# Altium PCB PCB1.PcbDoc
Units mil, origin at the board's own origin, x right, y up, seen from the top; angles counter-clockwise.
Board outline 1968.5 x 1377.95 mil, 4 copper layers (Top Layer, L2, L3, Bottom Layer), stack 30.634 mil thick; 121 components, 133 nets, 489 pads, 153 vias.
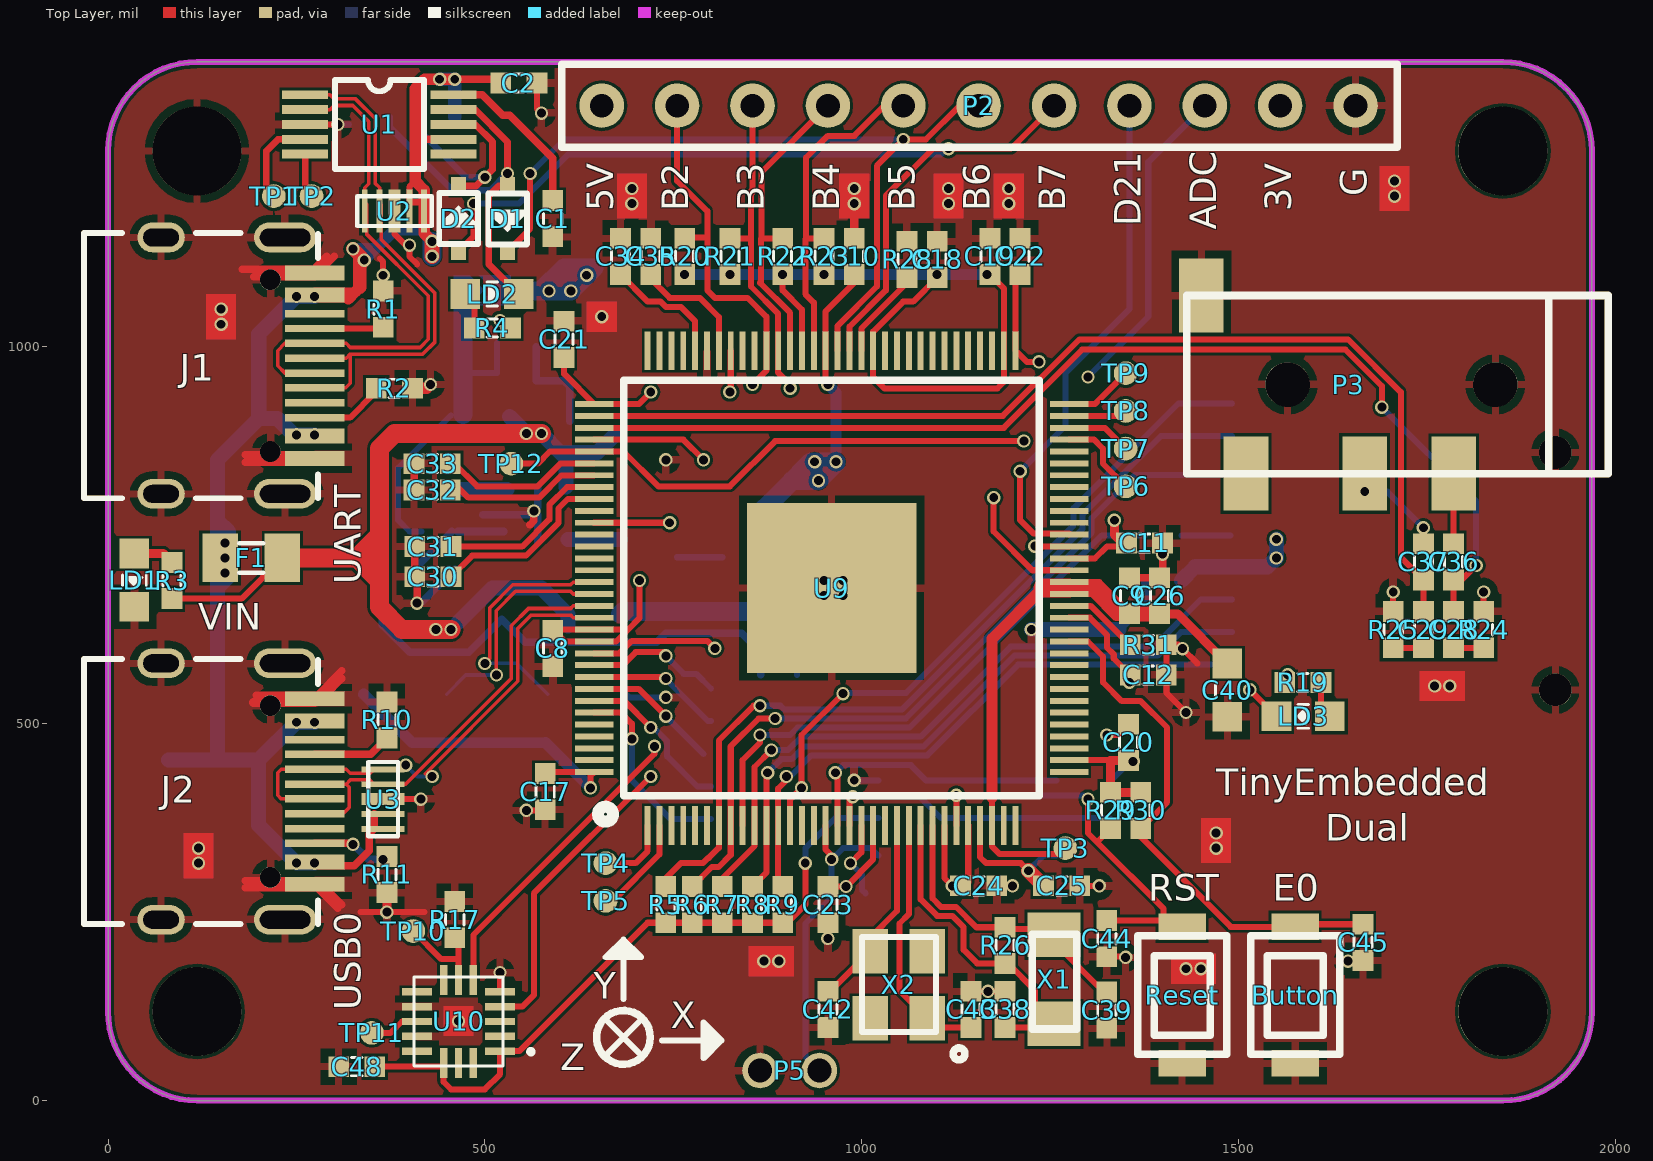
[diagram p0: Top Layer view]
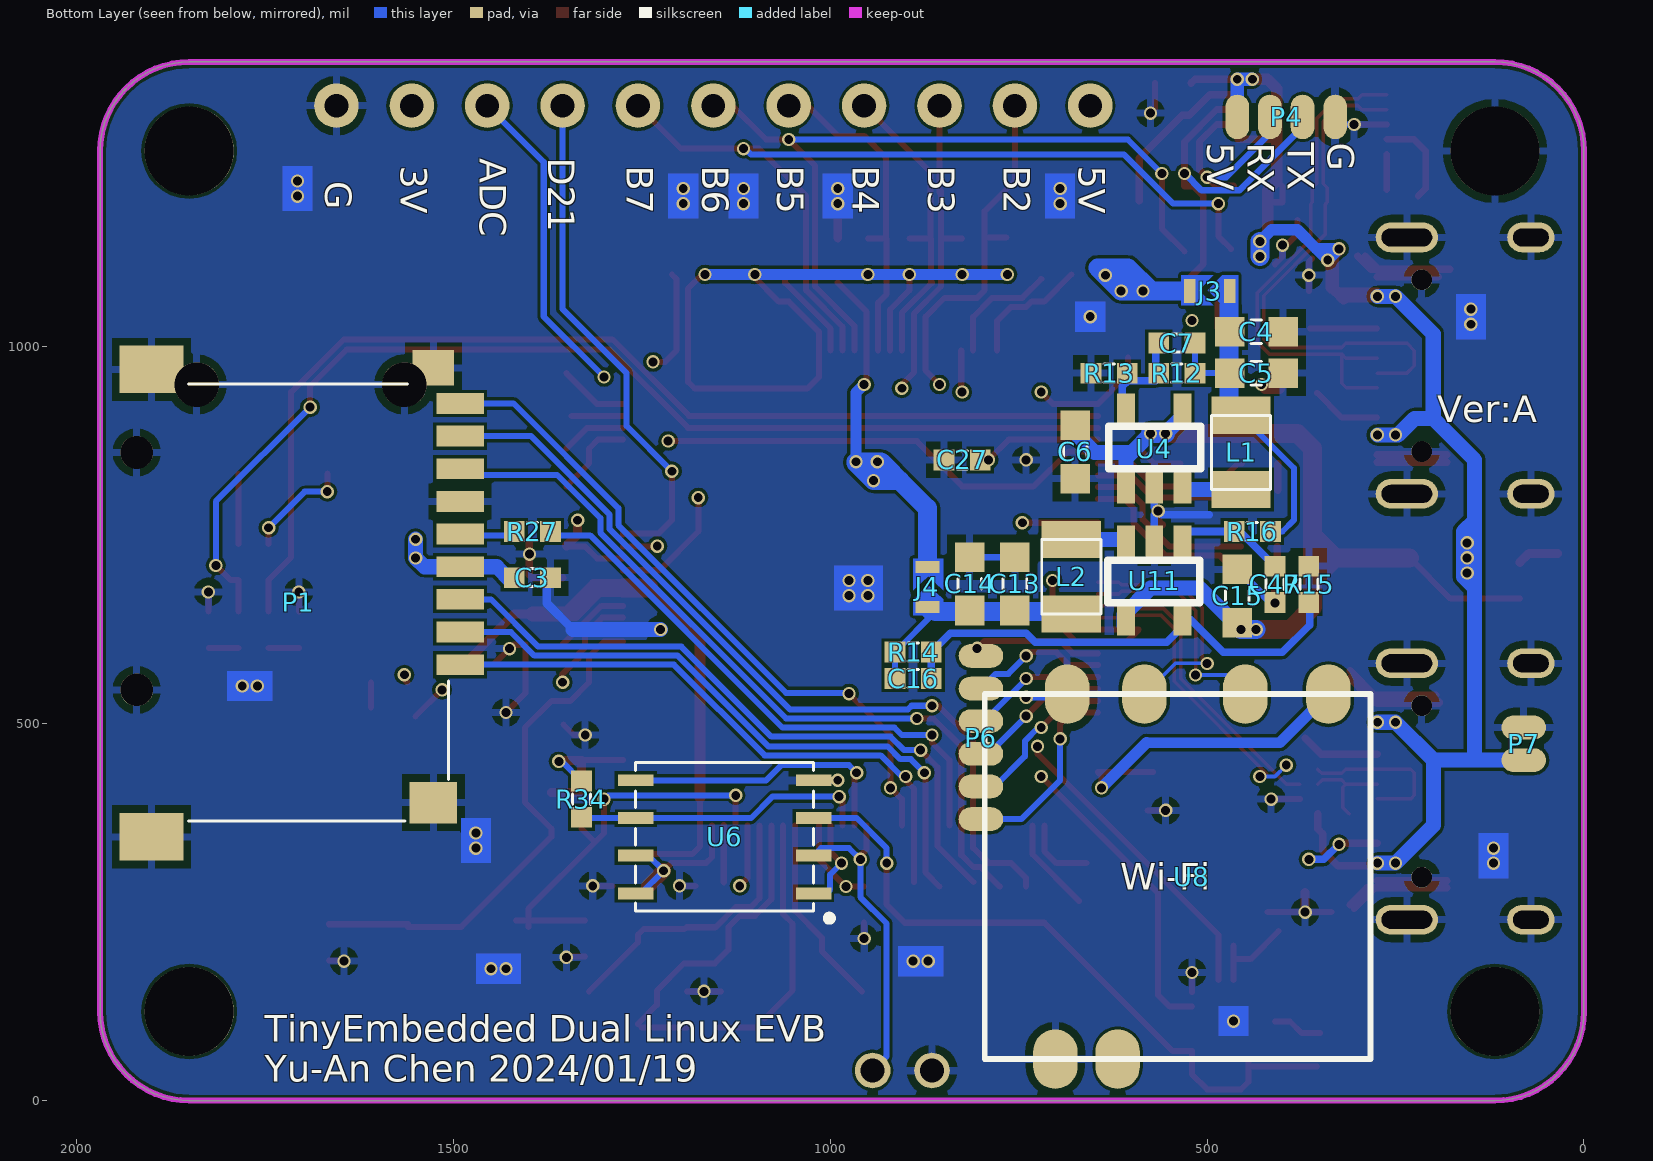
[diagram p1: Bottom Layer view, seen from below]
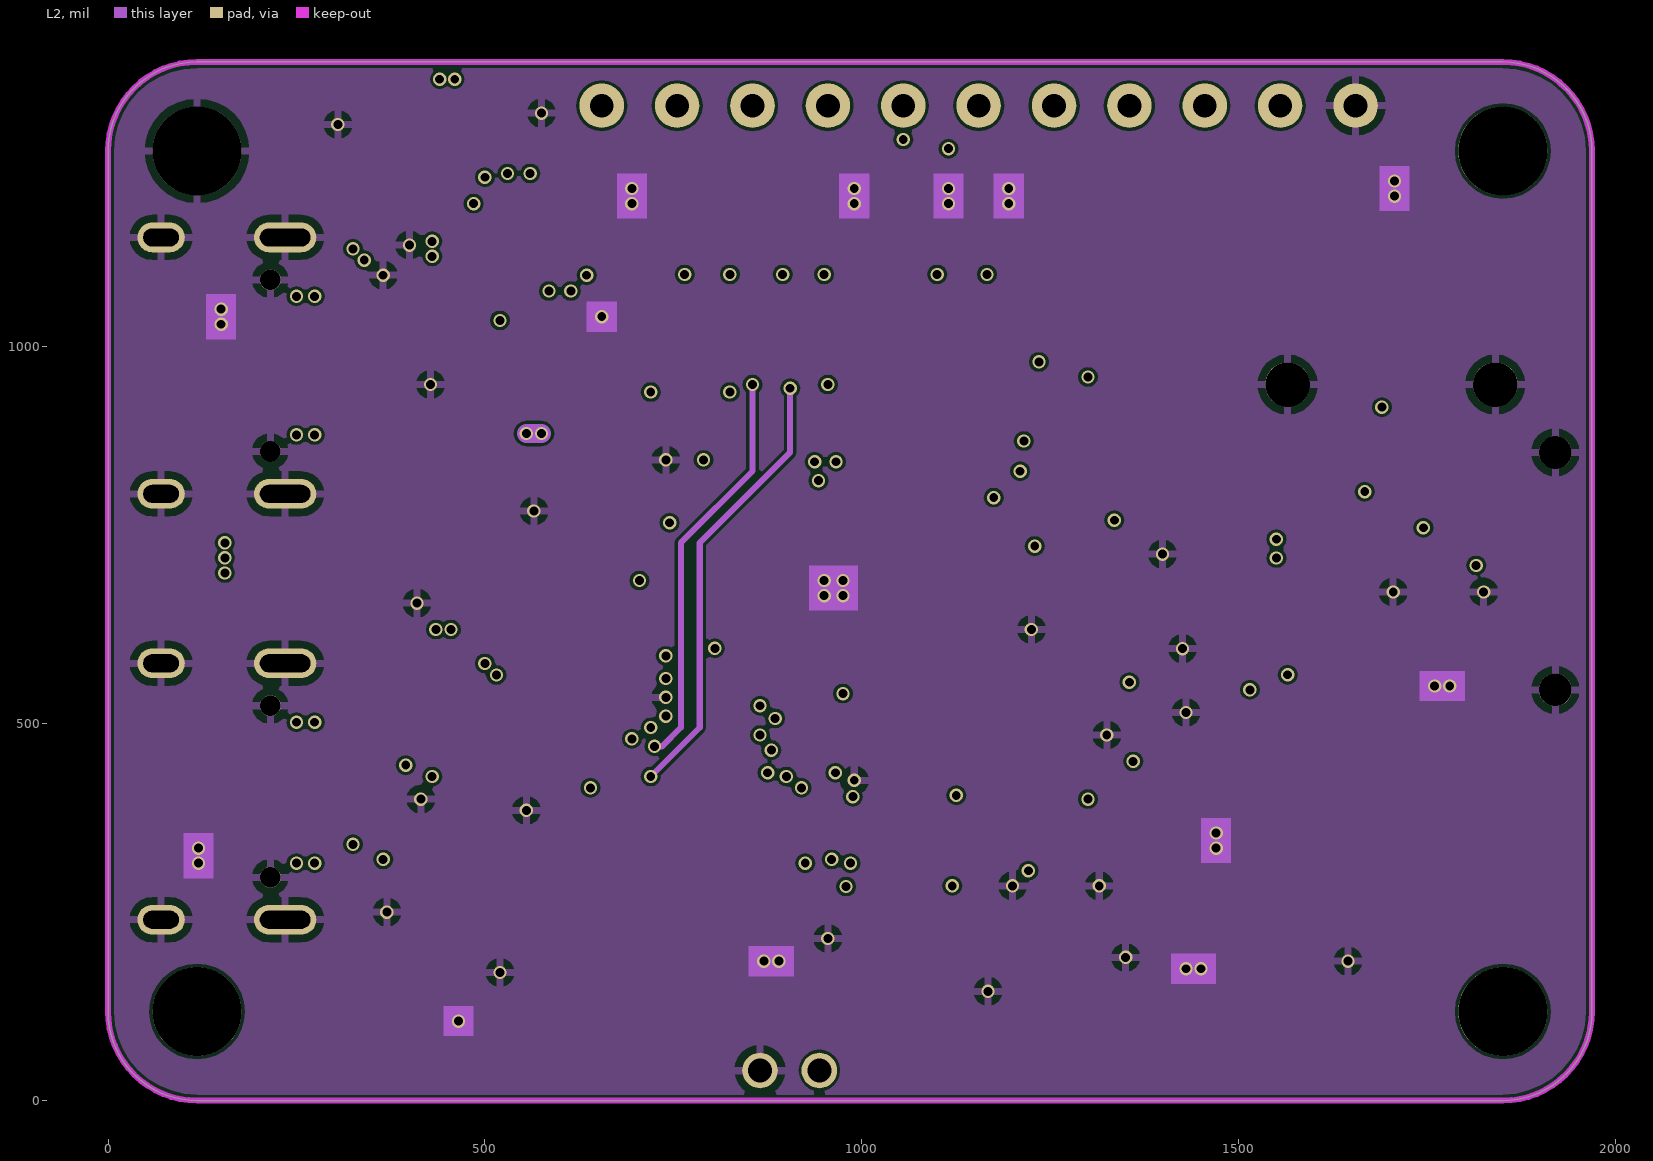
[diagram p2: L2]
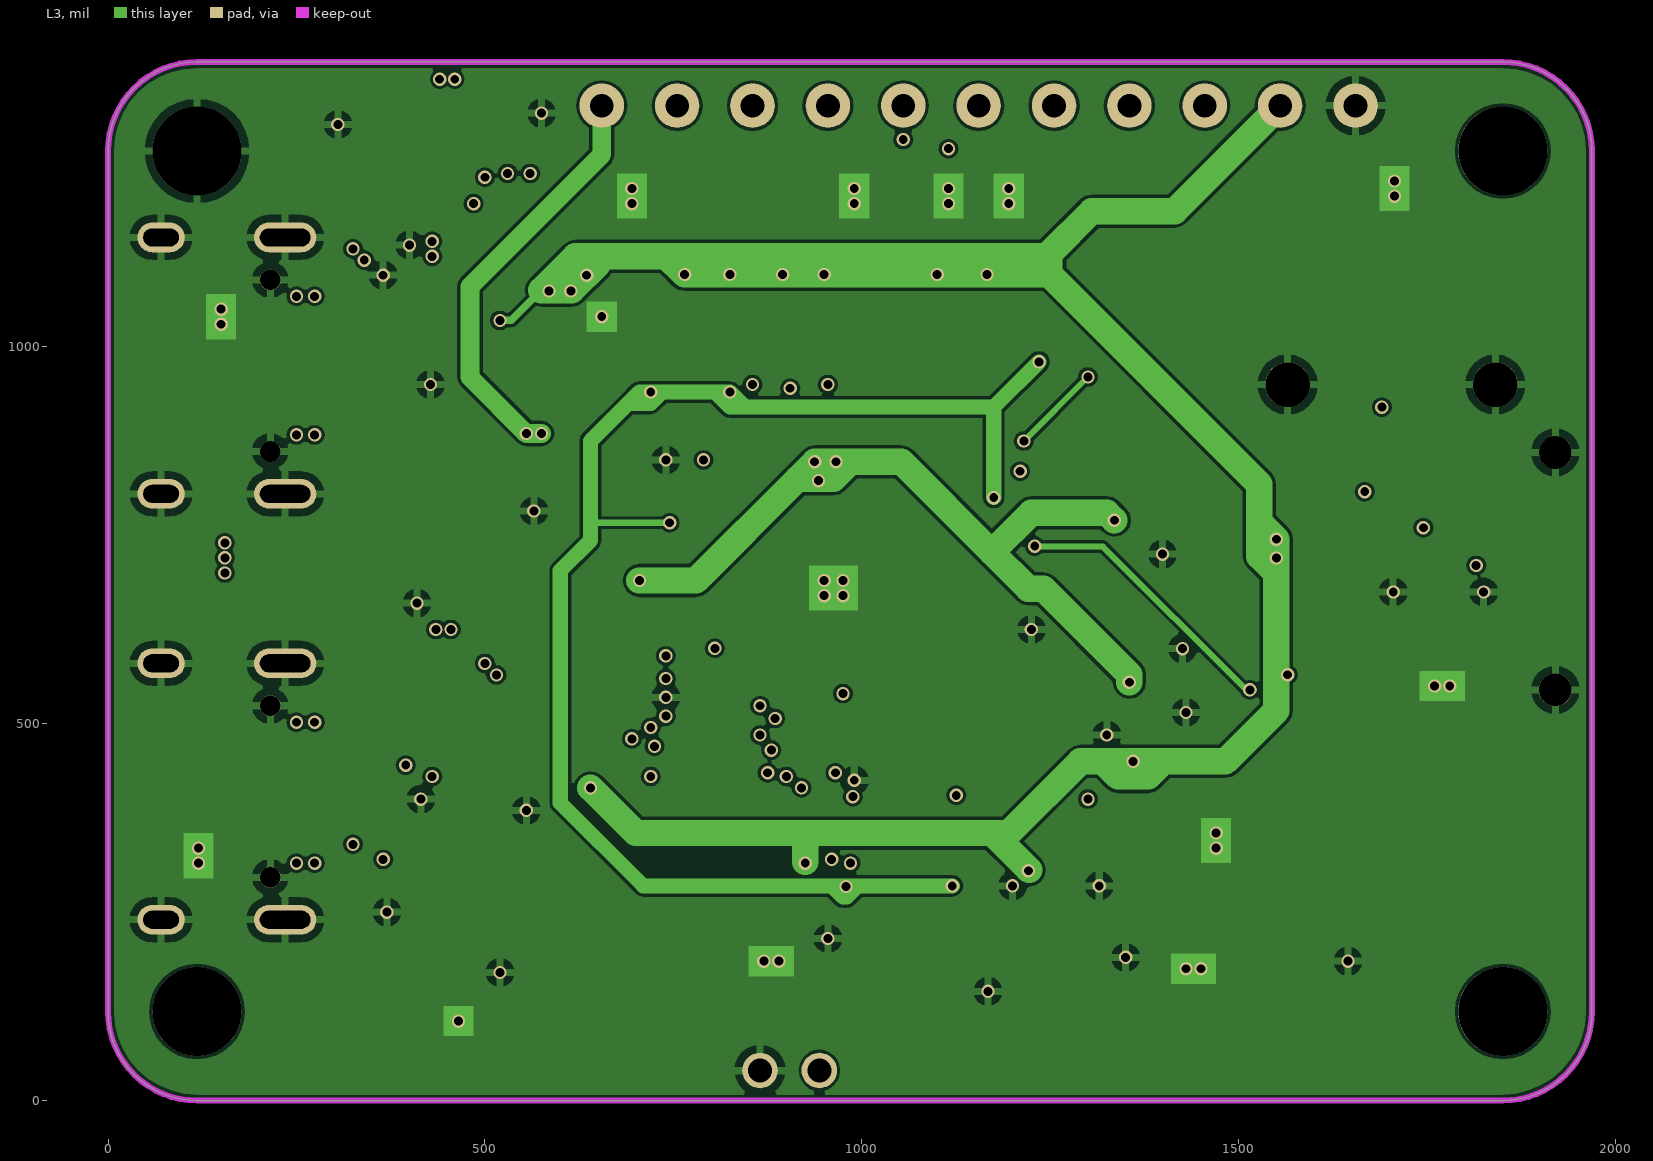
[diagram p3: L3]

## Layer stack, top to bottom
Top Solder: solder mask 0.4, Solder Resist, Dk 3.5
Top Layer: signal copper 1.4
Dielectric 1: core 10, FR-4, Dk 4.2
L2: signal copper 1.417
Dielectric 3: prepreg 5, Dk 4.2
L3: signal copper 1.417
Dielectric 2: core 10, Dk 4.2
Bottom Layer: signal copper 1.4
Bottom Solder: solder mask 0.4, Solder Resist, Dk 3.5

## Board outline
0,118.11 ccw(c118.11,118.11) 118.11,0 1850.39,0 ccw(c1850.39,118.11) 1968.5,118.11 1968.5,1259.84 ccw(c1850.39,1259.84) 1850.39,1377.95 118.11,1377.95 ccw(c118.11,1259.84) 0,1259.84

## Design rules (kind name [scope] priority, off if disabled: settings)
Clearance [All] p1: gap=4
ComponentClearance [All] p1 off: gap=10 collisioncheckmode=3 verticalgap=10 showdistances=FALSE
DiffPairsRouting [All] p1: maxlimit=4 minlimit=4 mostfreqgap=4 toplayer_minwidth=4.5 toplayer_maxwidth=4.7 toplayer_prefwidth=4.7 midlayer1_minwidth=4.5 midlayer1_maxwidth=4.7 midlayer1_prefwidth=4.7 midlayer2_minwidth=4.5 midlayer2_maxwidth=4.7 midlayer2_prefwidth=4.7 bottomlayer_minwidth=4.5 bottomlayer_maxwidth=4.7 bottomlayer_prefwidth=4.7 maxuncoupledlength=500
PolygonConnect [All] p1: connectstyle=Relief reliefconductorwidth=10 reliefentries=4 polygonreliefangle="90 Angle" airgapwidth=10
RoutingVias [All] p1: holewidth=11.81 width=17.72 viastyle="Through Hole" minholewidth=11.81 minwidth=17.72 maxholewidth=11.81 maxwidth=17.72
SolderMaskExpansion [All] p1: expansion=4
Width [All] p1: maxlimit=35 minlimit=8 preferedwidth=8
28 further rules are at their usual default settings.

## Classes and differential pairs
net class SDIO0: SDC0_CLK SDC0_CMD SDC0_D0 SDC0_D1 SDC0_D2 SDC0_D3
component class Sheet1: C1 C2 C3 C36 C37 D1 D2 F1 J1 J2 LD1 LD2 P1 P3 P4 P7 R1 R2 R3 R4 R5 R6 R7 R8 R9 R10 R11 TP1 TP2 U1 U2 U3
component class Sheet2: Button C44 C45 C48 LD3 P2 P5 R17 R19 R20 R21 R22 R23 R29 R30 R34 Reset TP10 TP11 U6 U8 U10
component class Sheet3: C25 C27 C28 C29 C30 C31 C32 C33 C34 C35 C38 C39 C42 C43 P6 R24 R25 R26 R27 R28 R31 TP3 TP4 TP5 TP6 TP7 TP8 TP9 TP12 U9 X1 X2
component class Sheet4: C4 C5 C6 C7 C8 C9 C10 C11 C12 C13 C14 C15 C16 C17 C18 C19 C20 C21 C22 C23 C24 C26 C40 C47 J3 J4 L1 L2 R12 R13 R14 R15 R16 U4 U11
differential pair USB1: +USB1_P -USB1_N
differential pair USB0: +USB0_P -USB0_N
differential pair USB_UART: +USB_UART_P -USB_UART_N

## Components (designator, comment, footprint, x,y, rotation, side; value= is the part's Value field where it differs from the comment)
Button "SW_2P" SW_2P_4 1575,140 r270 top
C1 "0.1uF,0402" C0402 590,1170 r270 top
C2 "0.1uF,0402" C0402 545,1350 r180 top
C3 "0.1uF,0402" C0402 1395,693.78 r0 bottom
C4 "22uF,0603" C0603 435,1020 r0 bottom
C5 "22uF,0603" C0603 435,965 r0 bottom
C6 "10uF,0603" C0603 675,860 r270 bottom
C7 "10pF,0402" C0402 540,1005 r0 bottom
C8 "0.1uF,0402" C0402 590,600 r90 top
C9 "0.1uF,0402" C0402 1355,669.78 r270 top
C10 "0.1uF,0402" C0402 990,1120 r270 top
C11 "0.1uF,0402" C0402 1375,739.78 r180 top
C12 "0.1uF,0402" C0402 1380,564.78 r180 top
C13 "22uF,0603" C0603 755,685 r270 bottom
C14 "22uF,0603" C0603 815,685 r270 bottom
C15 "10uF,0603" C0603 460,670 r90 bottom
C16 "10pF,0402" C0402 890,560 r180 bottom
C17 "0.1uF,0402" C0402 580,410 r90 top
C18 "0.1uF,0402" C0402 1100,1116 r270 top
C19 "0.1uF,0402" C0402 1170,1120 r270 top
C20 "0.1uF,0402" C0402 1353.78,475.22 r270 top
C21 "0.1uF,0402" C0402 605,1010 r270 top
C22 "0.1uF,0402" C0402 1210,1120 r270 top
C23 "0.1uF,0402" C0402 955,260 r90 top
C24 "4.7uF,0402" C0402 1155,285 r180 top
C25 "4.7uF,0402" C0402 1265,285 r180 top
C26 "0.1uF,0402" C0402 1395,669.78 r270 top
C27 "0.1uF,0402" C0402 825,850 r180 bottom
C28 "0.1uF,0402" C0402 1785,624.78 r90 top
C29 "0.1uF,0402" C0402 1745,624.78 r90 top
C30 "*0.1uF,0402" C0402 431,695 r0 top
C31 "*0.1uF,0402" C0402 431,735 r0 top
C32 "*0.1uF,0402" C0402 430,810 r0 top
C33 "*0.1uF,0402" C0402 430,845 r0 top
C34 "0.1uF,0402" C0402 680,1120 r270 top
C35 "0.1uF,0402" C0402 720,1120 r270 top
C36 "4.7uF,0402" C0402 1785,714.78 r90 top
C37 "4.7uF,0402" C0402 1745,714.78 r90 top
C38 "12pF,0402" C0402 1190,121 r90 top
C39 "12pF,0402" C0402 1325,120 r270 top
C40 "10uF,0603" C0603 1485,545 r90 top
C42 "20pF,0402" C0402 955,121 r270 top
C43 "20pF,0402" C0402 1145,121 r90 top
C44 "0.1uF,0402" C0402 1325,215 r270 top
C45 "0.1uF,0402" C0402 1665,210 r270 top
C47 "0.1uF,0402" C0402 410,685 r90 bottom
C48 "0.1uF,0402" C0402 330,45 r180 top
D1 "1N5819" SOD-323 530,1170 r270 top
D2 "1N5819" SOD-323 465,1170 r90 top
F1 "5V,1.5A,0805" F0805 190,720 r0 top
J1 "TypeC_F" Type-C_16P_F_0.5_DIP 235,805 r0 top locked
J2 "TypeC_F" Type-C_16P_F_0.5_DIP 235,240 r0 top locked
J3 "Jump_2" Jp0603 460,1075 r0 bottom
J4 "Jump_2" Jp0603 870,645 r90 bottom
L1 "2.2uH" IND_252010_SMD 455,860 r90 bottom
L2 "2.2uH" IND_252010_SMD 680,695 r270 bottom
LD1 "green,0603" LED0603 35,690 r270 top
LD2 "blue,0603" LED0603 510,1070 r0 top
LD3 "white,0603" LED0603 1585,509.78 r180 top
P1 "MicroSD" MicroSD 1920,665 r270 bottom locked
P2 "Header_11" Header_11 1255,1320 r180 top
P3 "PJ-320D" PJ-320D 1990,950 r180 top
P4 "Header_4" HEADER_4_SMD 330,1305 r0 bottom
P5 "Header_2_2mm" Header_2_2mm 865,40 r90 top
P6 "Header_6_SMD" HEADER_6_SMD 800,590 r270 bottom
P7 "Header_2_SMD" HEADER_2_SMD 80,495 r270 bottom
R1 "5.1KΩ,0402" R0402 365,1050 r270 top
R2 "5.1KΩ,0402" R0402 380,945 r180 top
R3 "4.7KΩ,0402" R0402 85,690 r90 top
R4 "4.7KΩ,0402" R0402 510,1025 r180 top
R5 "4.7KΩ,0402" R0402 740,260 r270 top
R6 "4.7KΩ,0402" R0402 775,260 r270 top
R7 "4.7KΩ,0402" R0402 815,260 r270 top
R8 "4.7KΩ,0402" R0402 855,260 r270 top
R9 "4.7KΩ,0402" R0402 895,260 r270 top
R10 "5.1KΩ,0402" R0402 370,505 r270 top
R11 "5.1KΩ,0402" R0402 370,300 r90 top
R12 "680KΩ,0402" R0402 540,965 r0 bottom
R13 "150KΩ,0402" R0402 630,965 r180 bottom
R14 "75KΩ,0402" R0402 890,595 r180 bottom
R15 "150KΩ,0402" R0402 365,685 r270 bottom
R16 "100KΩ,0402" R0402 440,755 r180 bottom
R17 "*0Ω,0402" R0402 460,240 r90 top
R19 "4.7KΩ,0402" R0402 1585,554.78 r180 top
R20 "4.7KΩ,0402" R0402 765,1120 r270 top
R21 "4.7KΩ,0402" R0402 825,1120 r270 top
R22 "*4.7KΩ,0402" R0402 895,1120 r270 top
R23 "*4.7KΩ,0402" R0402 950,1120 r270 top
R24 "33Ω,0402" R0402 1825,624.78 r270 top
R25 "33Ω,0402" R0402 1705,624.78 r270 top
R26 "680kΩ,0402" R0402 1190,206 r270 top
R27 "33Ω,0402" R0402 1395,755 r0 bottom
R28 "75Ω,0402" R0402 1060,1116 r270 top
R29 "4.7Ω,0402" R0402 1330,385 r270 top
R30 "4.7Ω,0402" R0402 1370,385 r270 top
R31 "240Ω,0402,1%" R0402 1380,604.78 r0 top
R34 "10KΩ,0402" R0402 1330,400 r90 bottom
Reset "SW_2P" SW_2P_4 1425,140 r270 top
TP1 "TP" TP 220,1200 r90 top
TP2 "TP" TP 270,1200 r90 top
TP3 "TP" TP 1270,335 r90 top
TP4 "TP" TP 660,315 r90 top
TP5 "TP" TP 660,265 r90 top
TP6 "TP" TP 1350,815 r90 top
TP7 "TP" TP 1350,865 r90 top
TP8 "TP" TP 1350,915 r90 top
TP9 "TP" TP 1350,965 r90 top
TP10 "TP" TP 405,225 r90 top
TP11 "TP" TP 350,90 r90 top
TP12 "TP" TP 535,845 r90 top
U1 "CH340E" MSOP-10 360,1295 r0 top
U2 "TPD4E05U06" USON-10 380,1180 r90 top
U3 "TPD4E05U06" USON-10 365,400 r0 top
U4 "SY8088" SOT-23-5p 570,865 r90 bottom
U6 "SPI Flash" WSON8 1140,350 r0 bottom
U8 "USB Wi-Fi Module" BL-M8188FU3 795,55 r90 bottom locked
U9 "Allwinner T113-s3" eLQFP128 960,680 r0 top locked
U10 "LIS3DH" LGA-16 465,105 r180 top
U11 "SY8088" SOT-23-5p 570,690 r270 bottom
X1 "32.768kHz" XTAL_3215_32.768KHz 1255,161 r270 top
X2 "24MHz" XTAL_SMD_3225 1000,91 r90 top

## Footprints (in the part's own frame and the unit in brackets; to place one, negate y for a bottom-side part, rotate by r counter-clockwise, add the part's x,y. Pads: shape width x height; smd on the part's side, far side on the other; paste and mask are expansions set on the pad)
BL-M8188FU3 [mm]
  oval 2x1.5 smd: 01(0,-2.38) 02(0,-4.48) 03(12.3,-11.58) 04(12.3,-8.78) 05(12.3,-5.38) 06(12.3,-2.78)
  silkscreen extent 0,-13 12.3,0
C0402 [mm]
  rect 0.7x0.7 smd: 01(-0.61,0) 02(0.61,0)
  silkscreen extent -0.18,-0.3 0.18,0.3, body extent -0.5,-0.25 0.5,0.25, height 0.58
C0603 [mm]
  rect 1x1 smd: 01(-0.911,0) 02(0.886,0)
  silkscreen extent -0.19,-0.4 0.17,0.4, body extent -0.81,-0.41 0.81,0.41, height 0.58
eLQFP128 [mm]
  rect 0.2x1.3 smd: 01(-6.2,-8) 02(-5.8,-8) 03(-5.4,-8) 04(-5,-8) 05(-4.6,-8) 06(-4.2,-8) 07(-3.8,-8) 08(-3.4,-8) 09(-3,-8) 10(-2.6,-8) 11(-2.2,-8) 12(-1.8,-8) 13(-1.4,-8) 14(-1,-8) 15(-0.6,-8) 16(-0.2,-8) 17(0.2,-8) 18(0.6,-8) 19(1,-8) 20(1.4,-8) 21(1.8,-8) 22(2.2,-8) 23(2.6,-8) 24(3,-8) 25(3.4,-8) 26(3.8,-8) 27(4.2,-8) 28(4.6,-8) 29(5,-8) 30(5.4,-8) 31(5.8,-8) 32(6.2,-8) 65(6.2,8) 66(5.8,8) 67(5.4,8) 68(5,8) 69(4.6,8) 70(4.2,8) 71(3.8,8) 72(3.4,8) 73(3,8) 74(2.6,8) 75(2.2,8) 76(1.8,8) 77(1.4,8) 78(1,8) 79(0.6,8) 80(0.2,8) 81(-0.2,8) 82(-0.6,8) 83(-1,8) 84(-1.4,8) 85(-1.8,8) 86(-2.2,8) 87(-2.6,8) 88(-3,8) 89(-3.4,8) 90(-3.8,8) 91(-4.2,8) 92(-4.6,8) 93(-5,8) 94(-5.4,8) 95(-5.8,8) 96(-6.2,8)
  rect 1.3x0.2 smd: 33(8,-6.2) 34(8,-5.8) 35(8,-5.4) 36(8,-5) 37(8,-4.6) 38(8,-4.2) 39(8,-3.8) 40(8,-3.4) 41(8,-3) 42(8,-2.6) 43(8,-2.2) 44(8,-1.8) 45(8,-1.4) 46(8,-1) 47(8,-0.6) 48(8,-0.2) 49(8,0.2) 50(8,0.6) 51(8,1) 52(8,1.4) 53(8,1.8) 54(8,2.2) 55(8,2.6) 56(8,3) 57(8,3.4) 58(8,3.8) 59(8,4.2) 60(8,4.6) 61(8,5) 62(8,5.4) 63(8,5.8) 64(8,6.2) 97(-8,6.2) 98(-8,5.8) 99(-8,5.4) 100(-8,5) 101(-8,4.6) 102(-8,4.2) 103(-8,3.8) 104(-8,3.4) 105(-8,3) 106(-8,2.6) 107(-8,2.2) 108(-8,1.8) 109(-8,1.4) 110(-8,1) 111(-8,0.6) 112(-8,0.2) 113(-8,-0.2) 114(-8,-0.6) 115(-8,-1) 116(-8,-1.4) 117(-8,-1.8) 118(-8,-2.2) 119(-8,-2.6) 120(-8,-3) 121(-8,-3.4) 122(-8,-3.8) 123(-8,-4.2) 124(-8,-4.6) 125(-8,-5) 126(-8,-5.4) 127(-8,-5.8) 128(-8,-6.2)
  rect 5.72x5.72 smd: 129(0,0)
  silkscreen extent -7.87,-7.87 7,7, body extent -8,-8 8,8, height 1.4
F0805 [mm]
  rect 1.2x1.63 smd: 01(-1.05,0) 02(1.05,0)
  silkscreen extent -0.4,-0.5 0.4,0.5, body extent -1.05,-0.5 1.05,0.5, height 0.5
Header_2_2mm [mm]
  round 1.2 hole 0.8: 01(0,0) 02(0,-2)
HEADER_2_SMD [mm]
  oval 0.8x1.5 smd: 01(0,0) 02(1.1,0)
HEADER_4_SMD [mm]
  oval 0.8x1.5 smd: 01(0,0) 02(1.1,0) 03(2.2,0) 04(3.3,0)
HEADER_6_SMD [mm]
  oval 0.8x1.5 smd: 01(0,0) 02(1.1,0) 03(2.2,0) 04(3.3,0) 05(4.4,0) 06(5.5,0)
Header_11 [mm]
  round 1.5 hole 0.8: 01(-10.16,0) 02(-7.62,0) 03(-5.08,0) 04(-2.54,0) 05(0,0) 06(2.54,0) 07(5.08,0) 08(7.62,0) 09(10.16,0) 10(12.7,0) 11(15.24,0)
  silkscreen extent -11.56,-1.4 16.59,1.4, body extent -11.43,-1.21 16.51,1.21, height 11.6
IND_252010_SMD [mm]
  rect 1.25x2 smd: 01(-1.25,0) 02(1.25,0)
  silkscreen extent -1.25,-1 1.25,1, body extent -1.22,-0.99 1.22,0.97, height 1
Jp0603 [mil]
  rect 15.75x31.5 smd: 01(10,1) 02(63,1)
  Top Layer region: 32,20 50.75,0 32,-20 74,-20 74,20
  Top Layer region: -1,20 -1,-20 20,-20 39,0 20,20
LED0603 [mm]
  rect 1x1 smd: 01(-0.911,0) 02(0.886,0)
  silkscreen extent -0.19,-0.4 0.17,0.4, body extent -0.83,-0.4 0.77,0.4, height 0.6
LGA-16 [mm]
  rect 1x0.25 smd: 01(-1.4,1) 02(-1.4,0.5) 03(-1.4,0) 04(-1.4,-0.5) 05(-1.4,-1) 09(1.4,-1) 10(1.4,-0.5) 11(1.4,0) 12(1.4,0.5) 13(1.4,1)
  rect 0.25x1 smd: 06(-0.5,-1.4) 07(0,-1.4) 08(0.5,-1.4) 14(0.5,1.4) 15(0,1.4) 16(-0.5,1.4)
  silkscreen extent -2.47,-1.5 1.5,1.5, body extent -1.5,-1.52 1.5,1.5, height 1
MicroSD [mm]
  rect 0.7x1.6 smd: 01(2.2,10.9) 02(1.1,10.9) 03(0,10.9) 04(-1.1,10.9) 05(-2.2,10.9) 06(-3.3,10.9) 07(-4.4,10.9) 08(-5.5,10.9) 09(-6.6,10.9)
  rect 1.2x1.4 smd: 06(-7.8,10)
  rect 1.6x2.15 smd: 06(-7.75,0.5) 06(8,0.5)
  round 1.1 hole 1.1 unplated: 06(-4.95,0) 06(3.05,0)
  rect 1.4x1.6 smd: 06(6.85,10)
  silkscreen extent -7.26,1.75 7.47,10.5
MSOP-10 [mm]
  rect 1.55x0.3 smd: 01(-2.5,1) 02(-2.5,0.5) 03(-2.5,0) 04(-2.5,-0.5) 05(-2.5,-1) 06(2.5,-1) 07(2.5,-0.5) 08(2.5,0) 09(2.5,0.5) 10(2.5,1)
  silkscreen extent -1.5,-1.5 1.5,1.5, body extent -2.51,-1.5 2.51,1.5, height 1.05
PJ-320D [mm]
  round 1.5 hole 1.5: 01(3.8,0) 01(10.8,0)
  rect 1.5x2.5 smd: 01(13.7,-3) 02(12.2,3) 03(8.2,3) 04(5.2,3)
  silkscreen extent 0,-3 14.2,3, body extent 0.18,-4.06 14.18,3.94, height 5
R0402 [mm]
  rect 0.7x0.7 smd: 01(-0.61,0) 02(0.61,0)
  silkscreen extent -0.18,-0.3 0.18,0.3, body extent -0.5,-0.25 0.5,0.25, height 0.58
SOD-323 [mm]
  rect 0.6x0.5 smd: 01(-1.1,0) 02(1.1,0)
  silkscreen extent -0.85,-0.65 0.86,0.65, body extent -1.3,-0.68 1.3,0.68, height 1.1
SOT-23-5p [mm]
  rect 1.1x0.6 smd: 01(-1.3,0.95) 02(-1.3,0) 03(-1.3,-0.95) 04(1.3,-0.95) 05(1.3,0.95)
  silkscreen extent -0.68,-1.56 0.75,1.54, body extent -1.5,-1.5 1.5,1.5, height 1.3
SW_2P_4 [mm]
  rect 0.9x1.6 smd: 01(-2.3,0) 02(2.3,0)
  silkscreen extent -2,-1.5 2,1.5, body extent -1.98,-1.55 2.01,1.47, height 1.8
TP [mm]
  round 0.8 smd: 01(0,0)
Type-C_16P_F_0.5_DIP [mm] "Straddle Mount Connector(0.8mm)"
  rect 2x0.25 smd: A1(1,7.57) A4(1,6.82) A5(1,5.57) A6(1,4.57) A7(1,4.07) A8(1,3.07) A9(1,1.82) A12(1,1.07) B1(1,1.32) B4(1,2.07) B5(1,2.57) B6(1,3.57) B7(1,5.07) B8(1,6.07) B9(1,6.57) B12(1,7.32)
  oval 1.6x1 hole 0.6 slot 1.2 at 0 deg: GND1(-4.18,8.64) GND3(-4.18,0)
  oval 2.1x1 hole 0.6 slot 1.7 at 0 deg: GND2(0,8.64) GND4(0,0)
  round 0.7 hole 0.7: GND5(-0.5,7.21) GND6(-0.5,1.43)
  silkscreen extent -6.78,-0.15 1.1,8.79, body extent -6.84,-0.17 0.76,8.77, height 3.08
USON-10 [mm]
  rect 0.85x0.2 smd: 01(-0.3,1) 02(-0.3,0.5) 04(-0.3,-0.5) 05(-0.3,-1) 06(0.3,-1) 07(0.3,-0.5) 09(0.3,0.5) 10(0.3,1)
  rect 0.85x0.4 smd: 03(-0.3,0) 08(0.3,0)
  silkscreen extent -0.5,-1.25 0.5,1.25
WSON8 [mm]
  rect 1.2x0.4 smd: 01(-2.997,1.905) 02(-2.997,0.635) 03(-2.997,-0.635) 04(-2.997,-1.905) 05(2.997,-1.905) 06(2.997,-0.635) 07(2.997,0.635) 08(2.997,1.905)
  silkscreen extent -3.62,-2.5 3,2.83, body extent -3,-2.46 3,2.46, height 0.75
XTAL_3215_32.768KHz [mm]
  rect 1.5x1.8 smd: 01(-1.5,0) 02(1.5,0)
  silkscreen extent -1.52,-0.74 1.68,0.76
XTAL_SMD_3225 [mil]
  rect 59.06x47.24 smd: 01(18,-87) 02(107,-11) 03(18,-11) 04(107,-87)
  silkscreen extent -37,-137 126,0, body extent 0,-98 126,0, height 24

## Part data
C1 C2 C3 C4 C5 C6 C7 C8 C9 C10 C11 C12 C13 C14 C15 C16 C17 C18 C19 C20 C21 C22 C23 C24 C25 C26 C27 C28 C29 C30 C31 C32 C33 C34 C35 C36 C37 C38 C39 C40 C42 C43 C44 C45 C47 C48: library part Cap
D1 D2: library part "Diode - Schottky"
F1: library part Fuse
J1 J2: library part Type-C_16P_F_0.5, "Female SMD Connector"
L1 L2: library part Ind
LD1 LD2 LD3: library part "Diode - LED"
P3: "Audio jack"
P5 P7: library part Header_2
P6: library part Header_6
R1 R2 R3 R4 R5 R6 R7 R8 R9 R10 R11 R12 R13 R14 R15 R16 R17 R19 R20 R21 R22 R23 R24 R25 R26 R27 R28 R29 R30 R31 R34: library part Res
U8: "BL-M8188FU3 RTL8188FTV"
X1 X2: library part XTAL

## Free pads (board coordinates)
  round 118.11 hole 118.11: 2(118.11,118.11) 2(118.11,1259.84) 2(1850.39,118.11) 2(1850.39,1259.84)

## Via types
v1: diameter 17.72, hole 11.81, Top Layer to Bottom Layer, tented both sides, 153 vias

## Nets (pads, with @x,y where several pads share a name; then routed paths per layer and width w, separated by ;. In a path a pad name is that pad's centre, name@x,y a point inside that pad or via, vN(x,y) a via of type N, cw(c..) or ccw(c..) an arc to the next point about the centre after c; other vN are vias at no path point)
0V9: C13.02 C14.02 C16.01 J4.01 L2.02 R14.01 | length 293.6
  Bottom Layer w8: J4.01@860,649 R14.01 C16.01@914,565
  Bottom Layer w25: L2.02 683.21,649 J4.01@860,649 ; J4.01@867.5,650.5 871,654 J4.01
3V3: C4.02 C5.02 C7.01 J3.01 L1.02 R12.01 R16.02 | length 436.3
  Bottom Layer w8: R16.02 400,755 385,770 385,839.21 L1.02 ; C5.02 471,965 R12.01 C7.01
  Bottom Layer w25: L1.02@471,910.21 471,965 471,1055
5V: C6.01 C15.01 F1.02 P2.11 R3.01 U4.01 U4.04 U11.04 | length 1907.8
  Top Layer w8: R3.01 177.34,666 F1.02
  Top Layer w25: F1.02 330,720 ; v1(455,625) v1(435,625) 390,625 360,655 360,690 ; v1(575,885) v1(555,885) 380,885 360,865 360,750 ; 330,720 360,750 ; 330,720 360,690 ; 360,690 360,750
  L2 w25: v1(555,885) v1(575,885)
  L3 w25: v1(575,885) v1(555,885) 480,960 480,1080 655,1255 P2.11
  Bottom Layer w20: C15.01@464.13,634.13 510,680 575,680 610,645 U11.04@610,630 ; U4.04@532.6,907.4 v1(555,885) ; v1(575,885) 600,860 ; U4.01 607.4,852.6 600,860 ; C6.01@675,885.87 649.13,860 600,860
  Bottom Layer w25: v1(435,625) v1(455,625) ; v1(555,885) v1(575,885)
CLK24M-OUT: U9.21
CTS#: TP2.01 U1.05 | length 47.2
  Top Layer w9: TP2.01@261.57,1208.43 U1.05
GND: Button.02 C1.02 C2.01 C3.01 C4.01 C5.01 C6.02 C8.01 C9.01 C10.01 C11.01 C12.01 C13.01 C14.01 C15.02 C17.01 C18.01 C19.01 C20.01 C21.01 C22.01 C23.01 C24.01 C25.01 C26.01 C27.01 C30.01 C31.01 C32.01 C33.01 C34.01 C35.01 C38.02 C39.02 C40.01 C42.02 C43.02 C44.02 C45.02 C47.01 C48.02 J1.A1 J1.A12 J1.B1 J1.B12 J1.GND1 J1.GND2 J1.GND3 J1.GND4 J1.GND5 J1.GND6 J2.A1 J2.A12 J2.B1 J2.B12 J2.GND1 J2.GND2 J2.GND3 J2.GND4 J2.GND5 J2.GND6 LD1.02 P1.06 P2.01 P3.01 P4.01 P5.01 P7.01 pad.2@118.11,1259.84 R1.01 R2.01 R10.01 R11.01 R13.01 R15.01 R17.02 R24.01 R25.01 R28.01 R31.02 Reset.02 U1.03 U2.03 U2.08 U3.03 U3.08 U4.02 U6.04 U8.01 U8.06 U9.91 U9.129 U10.05 U10.10 U10.12 U11.02 | length 2594
  Top Layer w8: U1.03 v1(305,1295) ; 335,250 v1(370,250) 420,250 ; 360.73,1117.33 365,1113.06 v1(365,1095) R1.01 ; U3.08 v1(415,400) ; U2.03 380,1150 395,1135 v1(400,1135) 400,1119.64 410.08,1109.55 ; v1(520,170) 520.12,169.88 U10.05 ; v1@556,386 v1(555,385) C17.01@579,385 ; C2.01 569,1316 v1(575,1310) ; v1(955,215) C23.01 ; C43.02 v1(1167.5,145) C38.02 ; C24.01 v1(1200,285) ; C25.01 v1(1315,285) ; C44.02 1349,191 v1(1350,190) ; v1(1325,485) 1340,485 C20.01@1354,499 ; v1(1430,515) 1404,541 C12.01 R31.02 1420.22,604.78 v1(1425.41,599.59) 1445,580 ; v1(1645,185) 1646,186 C45.02 ; R25.01 v1@1705,669.78 ; R24.01 v1(1825,674.78)
  Top Layer w10: 178.03,1103.03 J1.A1 ; 181.97,291.97 J2.B1 ; 181.97,856.97 J1.B1 ; 182.13,282.13 J2.A12 J2.A12@277.87,282.13 ; 182.13,847.13 J1.A12 ; 193.19,1093.19 J1.B12 ; 196.44,538.03 J2.A1 J2.A1@278.03,538.03 ; 290,1120 274.37,1104.37 J1.A1 ; 300,1120 283.03,1103.03 J1.A1 ; 305,255 J2.A12@277.87,282.13 ; 310,260 287.87,282.13 J2.A12@277.87,282.13 ; 310,560 288.03,538.03 J2.A1@278.03,538.03 ; 310,570 J2.A1@278.03,538.03 ; C32.01 C33.01 ; C31.01 C30.01 410,692 v1(410,660) ; v1@422.78,945 v1(427.78,950) ; 559.85,763.96 565,769.12 v1(565,782.17) ; C9.01 C26.01 ; C26.01@1399,697.78 C11.01
  Top Layer w11.81: 192.73,528.19 J2.B12 ; C10.01 v1(990,1190)
  Top Layer w12: v1(370,250) R11.01
  Top Layer w15: R2.01 v1@422.78,945
  L2 w8: v1@1425,600 v1(1425.41,599.59)
  Bottom Layer w8: v1(305,1295) P4.01@320,1295 ; U8.06 686.3,540 691.3,535 v1(740,535) ; C13.01 C14.01 ; v1(990,425) U6.04
  Bottom Layer w10: v1(410,660) 415.12,660 C15.02 ; 497.18,777.18 560.02,777.18 v1(565,782.17) ; U11.02 570,777.17 v1(565,782.17) ; U4.02 570,787.17 v1(565,782.17)
  Bottom Layer w11.81: 1341.22,625 1376,659.78 C3.01@1376,690
  Bottom Layer w20: v1(1225,625) 1341.22,625
  other v1: 465,105.5 1430,175 1450,175 870,185 890,185 120,315 120,335 1470,335 1470,355 1760,550 1780,550 950,670 975,670 1705,674.78 950,690 975,690 1399,725 740,850 150,1030 655,1040 150,1050 695,1190 1115,1190 1195,1190 1706.77,1200 695,1210 990,1210 1115,1210 1195,1210 1706.77,1220
GPADC0: P2.03 TP12.01 U9.101 | length 1275
  Top Layer w8: TP12.01 570,845 586.1,861.1 U9.101 683.9,861.1 730,815 825,815 885,875 v1(1215,875)
  L3 w8: v1(1215,875) v1(1300,960)
  Bottom Layer w8: v1(1300,960) 1380,1040 1380,1245 P2.03
HPOUTFB: C27.02 U9.100 | length 156.1
  Top Layer w8: U9.100 763.15,876.85 v1(790,850)
HPOUTL: C28.02 C36.01 U9.99 | length 1477.9
  Top Layer w8: U9.99 1188.41,892.6 1292.33,996.51 1641.51,996.51 1690,948.03 v1(1690,920) ; C28.02 C36.01 1795.78,690.78 v1(1815,710)
  Bottom Layer w8: v1(1690,920) 1815,795 v1(1815,710)
HPOUTR: C29.02 C37.01 U9.98 | length 1444.7
  Top Layer w8: U9.98 1187.19,908.35 1288.84,1010 1645,1010 1715,940 1715,720.78 C37.01 C29.02
INT1: TP11.01 U10.11 | length 66.1
  Top Layer w8: TP11.01 375,90 390,105 U10.11
LINEINL: U9.96
LINEINR: U9.95
MICIN3N: U9.88
MICIN3P: U9.87
NetC7_02: C7.02 R12.02 R13.02 U4.05 | length 138.8
  Bottom Layer w10: C7.02@568,1000 568,955 604.8,955 612.4,947.4 U4.05@612.4,901.18
NetC16_02: C16.02 R14.02 R15.02 U11.05 | length 622
  Bottom Layer w10: R15.02@364,660 364,631 400,595 478.78,595 522.6,638.82 553.25,608.17 728.17,608.17 740,620 841,620 R14.02 C16.02@866,565
NetC28_01: C28.01 R24.02 | length 39
  Top Layer w8: C28.01 R24.02@1824,600.78
NetC29_01: C29.01 R25.02 | length 40
  Top Layer w8: R25.02 C29.01
NetC34_02: C34.02 U9.92 | length 163.7
  Top Layer w8: C34.02 716,1060 733.03,1060 740.03,1053 760,1053 778.9,1034.1 U9.92
NetC35_02: C35.02 U9.90 | length 155.9
  Top Layer w8: C35.02@720,1090 745,1065 785,1065 810.39,1039.61 U9.90
NetC36_02: C36.02 P3.04 | length 92.8
  Top Layer w8: C36.02 P3.04@1785,831.61
NetC37_02: C37.02 P3.03 | length 142.9
  Top Layer w8: v1(1667.17,807.83) P3.03 ; C37.02 v1(1745,760)
  Bottom Layer w8: v1(1667.17,807.83) 1697.17,807.83 v1(1745,760)
NetJ1_A5: J1.A5 R1.02 | length 88.9
  Top Layer w8: J1.A5 R1.02@363.29,1024.29
NetJ1_B5: J1.B5 R2.02 | length 93.2
  Top Layer w8: J1.B5 321.18,906.18 R2.02@354,939
NetJ2_A5: J2.A5 R10.02 | length 104.6
  Top Layer w10: J2.A5 348.29,459.29 R10.02
NetJ2_B5: J2.B5 R11.02 | length 99.4
  Top Layer w10: J2.B5 323.82,341.18 v1(325,340)
  Bottom Layer w10: v1(325,340) 345,320 v1(365,320)
NetL1_01: L1.01 U4.03 | length 74.6
  Bottom Layer w20: L1.01 U4.03@529.57,810.79
NetL2_01: L2.01 U11.03 | length 69.6
  Bottom Layer w20: U11.03@610.43,744.21 L2.01
NetLD1_01: LD1.01 R3.02 | length 54.9
  Top Layer w12: LD1.01 73.13,725.87 R3.02
NetLD2_01: LD2.01 R4.02 | length 33.1
  Top Layer w8: R4.02 LD2.01@486,1058.13
NetLD3_01: LD3.01 R19.01 | length 33.1
  Top Layer w8: LD3.01@1609,521.65 R19.01
NetR27_01: R27.01 U9.09 | length 750.3
  Top Layer w8: U9.09 841.89,451.89 865,475 v1(865,485)
  Bottom Layer w8: v1(865,485) 905,485 915,495 1063.5,495 1318.5,750 R27.01@1376,750
NetR28_02: R28.02 U9.78 | length 122.2
  Top Layer w8: U9.78 999.37,1024.37 1060,1085 R28.02
NetR31_01: R31.01 U9.47 | length 101.6
  Top Layer w8: U9.47 1303.62,656.38 R31.01@1355.22,604.78
PB2: P2.10 R20.01 U9.86 U10.06 | length 1430.2
  Top Layer w8: U10.06 484.68,219.68 725,460 v1(725,470) ; P2.10 755,1220 795,1180 795,1145 ; R20.01@766,1145 795,1145 ; v1(855,950) 873.39,968.39 U9.86 873.39,1040 848.39,1065 805,1065 795,1075 795,1145
  L2 w8: v1(725,470) 735,470 760,495 760,740 855,835 v1(855,950)
PB3: P2.09 R21.01 U9.85 U10.04 | length 1425.9
  Top Layer w8: U10.04 549.68,124.68 565,140 565,275 v1(720,430) ; R21.01 852.51,1144 ; P2.09 855,1205 853,1207 853,1080.03 889.13,1043.9 U9.85 889.13,965.87 905,950 v1(905,945)
  L2 w8: v1(720,430) 785,495 785,740 905,860 v1(905,945)
PB4: P2.08 R22.01 U9.84 | length 406.4
  Top Layer w8: 865,1085 904.88,1045.12 U9.84 ; 866,1086 866,1144 ; R22.01 866,1144 ; P2.08 867,1232 867,1145 866,1144
PB5: P2.07 R23.01 U9.82 | length 442.7
  Top Layer w8: U9.82 936.38,1058.62 925,1070 925,1143 926,1144 ; R23.01 926,1144 ; P2.07 1030,1320 990,1280 955,1280 926,1251 926,1144
PB6: D1.02 P2.06 U9.80 | length 1064.1
  Top Layer w8: D1.02 560,1156.69 v1(560,1230) ; U9.80 967.87,1027.87 1020,1080 1020,1240 v1(1055,1275) 1085,1275 1130,1320 P2.06
  Bottom Layer w8: v1(560,1230) 605,1275 v1(1055,1275)
PB7: D2.01 P2.05 U9.79 | length 1225.2
  Top Layer w8: D2.01@468.31,1130 485,1146.69 v1(485,1190) ; U9.79 983.62,1026.65 1032,1075.03 1032,1200.46 1094.42,1262.89 1197.89,1262.89 P2.05
  Bottom Layer w8: v1(485,1190) 545,1190 610,1255 1105,1255 1112.89,1262.89 v1(1115,1262.89)
PD0: U9.55
PD1: U9.56
PD2: U9.57
PD3: U9.58
PD4: U9.59
PD5: U9.60
PD6: TP6.01 U9.61 | length 112.4
  Top Layer w8: U9.61 1308.15,876.85 1320,865 1320,845 TP6.01
PD7: TP7.01 U9.62 | length 86.5
  Top Layer w8: U9.62 1322.4,892.6 TP7.01
PD8: TP8.01 U9.63 | length 68.4
  Top Layer w8: U9.63 TP8.01@1343.35,908.35
PD9: TP9.01 U9.64 | length 92
  Top Layer w8: U9.64 1309.09,924.09 TP9.01
PD10: U9.67
PD11: U9.68
PD12: U9.70
PD13: U9.69
PD14: U9.71
PD15: U9.72
PD16: U9.73
PD17: U9.74
PD18: U9.75
PD19: U9.76
PD20: U9.54
PD21: P2.04 U9.53 | length 683.9
  Top Layer w8: v1(1210,835) 1210,770 1227.52,752.48 1274.96,752.48 U9.53
  Bottom Layer w8: v1(1210,835) 1270,895 1270,965 1355,1050 P2.04
PD22: LD3.02 U9.52 | length 465.2
  Top Layer w8: v1(1229.38,735.62) 1229.88,735.12 U9.52 ; v1(1514.89,545) LD3.02
  L3 w8: v1(1229.38,735.62) 1230,735 1319.78,735 1509.78,545 v1@1520,545
PE0: Button.01 C45.01 R30.02 U9.44 | length 701.3
  Top Layer w8: U9.44 1300.05,609.13 1320,589.19 1320,555 1345,530 1370,530 1405,495 1405,396 R30.02 1370,350 1489.45,230.55 Button.01@1560,230.55 ; Button.01@1560,234 C45.01
PE1: U9.45
PE2: U9.35
PE3: U9.33
PE4: U9.43
PE5: U9.42
PE6: U9.41
PE7: U9.40
PE8: U9.39
PE9: U9.38
PE10: U9.37
PE11: U9.36
PE12: U9.32
PE13: U9.31
PG10: U9.05
PG11: U9.06
PG12: U9.124
PG13: U9.125
PG14: U9.126
PG15: U9.127
RESET: C44.01 R29.02 Reset.01 U9.27 | length 544.6
  Top Layer w8: U9.27 v1(1125.35,405) ; v1(1300,400) 1300,355 1312,343 ; C44.01 Reset.01@1400,239 ; R29.02 1312,343 ; Reset.01@1400,230.55 Reset.01@1400,239 ; Reset.01@1416.55,239 Reset.01@1400,239 ; 1312,343 1400,255 Reset.01@1400,239
  Bottom Layer w8: v1(1125.35,405) 1295,405 v1(1300,400)
RST#: TP1.01 U1.04 | length 122.1
  Top Layer w9: TP1.01 210,1210 210,1260 225.32,1275.32 U1.04
SDC0_CLK: P1.05 R27.02 | length 65.3
  Bottom Layer w8: R27.02@1424,750 P1.05@1489.25,750
SDC0_CMD: P1.03 R7.01 U9.10 | length 897.7
  Top Layer w8: R7.01@810,290 857.64,337.64 U9.10 857.64,442.64 v1(880,465)
  Bottom Layer w8: v1(880,465) 902,465 920,483 1078,483 1197.39,602.39 1387.39,602.39 1450,665 P1.03
SDC0_D0: P1.07 R6.01 U9.08 | length 1041.1
  Top Layer w8: R6.01 801,310 810,310 826.14,326.14 U9.08 826.14,469.98 863.16,507 v1(885,507)
  Bottom Layer w8: v1(885,507) 1058.53,507 1305,753.47 1305,772.88 1362.12,830 1482.64,830 P1.07
SDC0_D1: P1.08 R5.01 U9.07 | length 1103.6
  Top Layer w8: R5.01 740,295 760,315 789.03,315 796.03,322 797,322 810.39,335.39 U9.07 810.39,477.75 856.5,523.86 v1(865,523.86)
  Bottom Layer w8: v1(865,523.86) 891.98,523.86 896.84,519 1053.56,519 1293,758.44 1293,777.85 1396.68,881.54 P1.08
SDC0_D2: P1.01 R9.01 U9.12 | length 804
  Top Layer w8: R9.01@889.13,289.87 U9.12 889.13,414.13 905,430 v1(900,430)
  Bottom Layer w8: v1(900,430) 905,430 933,458 1086.94,458 1207.33,578.39 P1.01
SDC0_D3: P1.02 R8.01 U9.11 | length 852.5
  Top Layer w8: R8.01 873.39,302.39 U9.11 873.39,433.39 v1(875,435)
  Bottom Layer w8: v1(875,435) 893,453 906.97,453 923.97,470 1081.97,470 1202.36,590.39 1392.36,590.39 1423.66,621.69 P1.02
SDC0_DET: P1.09 U9.13 | length 894.8
  Top Layer w8: U9.13 904.88,399.88 v1(920,415) 920,485 v1(975,540)
  Bottom Layer w8: v1@918.14,413.14 v1(920,415) ; v1@975,540.72 1058.31,540.72 1281,763.41 1281,786 1419.84,924.84 P1.09
SDC1_CLK: P6.03 U9.120 | length 179.6
  Top Layer w8: U9.120 733.11,561.89 735,560 v1(740,560)
  Bottom Layer w8: v1(740,560) 740,559.33 795.94,503.39 P6.03
SDC1_CMD: P6.01 U9.118 | length 171
  Top Layer w8: U9.118 678.39,593.39 695,610 795,610 v1(805,600)
SDC1_D0: P6.02 U9.119 | length 185.1
  Top Layer w8: U9.119 682.64,577.64 700,595 740,595 v1(740,590)
  Bottom Layer w8: v1(740,590) 763.75,566.25 780.44,566.25 P6.02
SDC1_D1: P6.04 U9.121 | length 183.5
  Top Layer w8: U9.121 703.86,546.14 735,515 740,515 v1(740,510)
  Bottom Layer w8: v1(740,510) P6.04@789.92,460.08
SDC1_D2: P6.06 U9.123 | length 257.4
  Top Layer w8: U9.123 680.35,514.65 695,500 v1(695,480)
  Bottom Layer w8: v1(695,480) 695,425 746.54,373.46 P6.06
SDC1_D3: P6.05 U9.122 | length 213.8
  Top Layer w8: U9.122 684.61,530.39 v1(720,495)
  Bottom Layer w8: v1(720,495) 723.84,495 741.86,476.98 741.86,456.86 781.95,416.77 P6.05
SDO/SA0: R17.01 TP10.01 U10.07 | length 122.2
  Top Layer w8: TP10.01 442.2,187.8 462.8,187.8 465,190 ; U10.07 465,190 ; R17.01@465,206 465,190
SOC_RX: D2.02 P4.03 U1.08 | length 281.4
  Top Layer w9: U1.08 487.18,1295 510,1272.18 510,1235 v1(500,1225) 488.31,1213.31 D2.02
  Bottom Layer w9: P4.03 416.61,1283.39 475,1225 v1(500,1225)
SOC_TX: D1.01 LD2.02 P4.02 U1.09 | length 539
  Top Layer w9: U1.09 487.18,1314.68 530,1271.86 v1(530,1230) D1.01 518.31,1213.31 505,1200 505,1109.88 LD2.02
  Bottom Layer w9: P4.02 373.31,1291.69 457.36,1207.64 507.19,1207.64 529.55,1230 v1(530,1230)
SPI0_CLK: U6.01 U9.19 | length 104.3
  Top Layer w8: v1(985,315) 999.37,329.37 U9.19
  Bottom Layer w8: v1(985,315) 1000,300 1000,280 U6.01@1005,275
SPI0_CS: R34.01 U6.06 U9.18 | length 398.8
  Top Layer w8: U9.18 983.62,403.62 987.8,403.62 v1(988.14,403.28)
  L2 w8: v1(988.14,403.28) v1@988.14,406.28
  Bottom Layer w8: v1(988.14,403.28) 1076.72,403.28 1105,375 U6.06 R34.01@1329,375
SPI0_HOLD: U9.14
SPI0_MISO: P5.02 U6.02 U9.16 | length 422.9
  Top Layer w8: U9.16 952.13,332.87 960,325 v1(960,320)
  Bottom Layer w8: P5.02 925,58.74 925,235 960,270 v1(960,320) 975,335 1012,335 U6.02
SPI0_MOSI: U6.05 U9.17 | length 376.6
  Top Layer w8: v1(965,435) 967.87,432.13 U9.17
  Bottom Layer w8: v1(965,435) 975,445 1065,445 1085,425 U6.05
SPI0_WP: U9.15
TP-X1: C33.02 U9.102 | length 216
  Top Layer w8: C33.02 459.65,845 489.65,815 570,815 600.35,845.35 U9.102
TP-X2: C32.02 U9.103 | length 204.8
  Top Layer w8: C32.02@460,818 478,800 571.97,800 601.58,829.61 U9.103
TP-Y1: C31.02 U9.104 | length 234.1
  Top Layer w8: C31.02 549.49,735 585.5,771.01 585.5,790.5 608.86,813.86 U9.104
TP-Y2: C30.02 U9.105 | length 244.2
  Top Layer w8: C30.02 483,723 554.46,723 597.5,766.04 597.5,785.53 610.08,798.11 U9.105
U1_3V: C1.01 U1.10 | length 222.5
  Top Layer w10: U1.10 496.34,1334.37 523.74,1306.97 533.03,1306.97 590,1250 C1.01
UART1_CTS: U9.04
UART1_RTS: U9.03
UART1_RX: TP5.01 U9.02 | length 125.6
  Top Layer w8: TP5.01@670,265 731.65,326.65 U9.02
UART1_TX: TP4.01 U9.01 | length 96.6
  Top Layer w8: TP4.01 700,315 715.91,330.91 U9.01
USB0_N: J2.A7 J2.B7 U3.01 U3.10 U9.115 | length 610.6
  Top Layer w4.7: J2.A7 229.76,400.24 225,405 225,435 229.61,439.61 J2.B7 316.09,439.61 321.58,434.11 347.93,434.11 U3.01 ; 421.15,433.85 543.7,556.4 543.7,626.4 561.46,644.15 613.57,644.15 617.1,640.63 U9.115
  Bottom Layer w4.7: v1(395,445) 410,430 v1(430,430)
USB0_P: J2.A6 J2.B6 U3.02 U3.09 U9.114 | length 535.3
  Top Layer w4.7: J2.A6 316.09,419.92 ; J2.B6@311.68,380.55 320.09,388.96 320.09,415.92 316.09,419.92 ; U3.02 347.46,425.41 321.58,425.41 316.09,419.92 ; U3.09 394.68,419.68 535,560 535,630 557.85,652.85 613.57,652.85 617.1,656.38 U9.114
USB1_N: U8.04 U9.113 | length 304.2
  Top Layer w4.7: v1(515.36,564.64) 515.21,564.79 515.21,594.79 515,595 515,650 540.65,675.65 613.57,675.65 617.1,672.13 U9.113
  Bottom Layer w4.7: U8.04 474.72,564.64 v1(515.36,564.64)
USB1_P: U8.05 U9.112 | length 329.2
  Top Layer w4.7: v1(500,580) 506.3,586.3 506.3,653.6 537.05,684.35 613.57,684.35 617.1,687.87 U9.112
  Bottom Layer w4.7: v1(500,580) 542.44,580 U8.05
USB_UART_N: J1.A7 J1.B7 U1.02 U2.01 U2.10 | length 705.9
  Top Layer w4.7: U1.02 294.44,1314.68 299.93,1320.18 324.82,1320.18 346.12,1298.88 346.12,1216.39 340.63,1210.89 U2.10 342.98,1189.46 342.98,1149.72 425,1067.7 425,1010 414.11,999.11 321.58,999.11 316.09,1004.61 J1.B7 234.61,1004.61 225,995 225,975 234.76,965.24 J1.A7
USB_UART_P: J1.A6 J1.B6 U1.01 U2.02 U2.09 | length 692
  Top Layer w4.7: U1.01 294.44,1334.37 299.93,1328.88 328.43,1328.88 354.82,1302.48 354.82,1216.39 360.32,1210.89 U2.09 362.66,1189.46 362.66,1142.34 433.7,1071.3 433.7,1006.4 417.72,990.41 321.58,990.41 ; J1.B6 315.55,945.55 321.58,951.58 321.58,990.41 ; J1.A6 316.09,984.92 321.58,990.41
VBUS: C2.02 F1.01 J1.A4 J1.A9 J1.B4 J1.B9 J2.A4 J2.A9 J2.B4 J2.B9 P4.04 P7.02 U1.07 U2.04 U2.05 U2.06 U2.07 U3.04 U3.05 U3.06 U3.07 | length 2297.3
  Top Layer w8: 407.56,1220 399.68,1212.13 U2.07 U2.06
  Top Layer w10: J2.A9 326.65,311.65 346.28,331.28 346.28,353.72 U3.05 U3.04 ; J1.B9 318.66,1063.66 ; J1.A4 328.5,1073.5 ; 407.56,1275.32 U1.07 ; v1(460,1355) 516,1355 C2.02
  Top Layer w15: 318.66,1063.66 328.5,1073.5 334.25,1079.25 ; v1(430,1140) 419.37,1150.63 U2.05 U2.06 419.37,1208.19 407.56,1220 407.56,1275.32 407.56,1342.56 420,1355 v1(440,1355) v1(460,1355)
  Top Layer w18: v1(325,1130) v1@334.25,1120.75 ; 334.25,1079.25 v1@334.25,1109.25 ; v1@334.25,1109.25 v1@334.25,1120.75 ; v1@334.25,1109.25 v1(340,1115) v1@334.25,1120.75
  Top Layer w20: v1(430,1120) v1(430,1140)
  Bottom Layer w15: v1(430,1140) 414.64,1155.36 380.36,1155.36 355,1130 ; 355,1130 v1(340,1115) v1(325,1130) 355,1130
  Bottom Layer w18: v1(440,1355) v1(460,1355) P4.04@460,1305.08
  Bottom Layer w20: P7.02 145,451.69 ; v1(274.15,315) v1(250,315) 199.68,365.32 199.68,451.69 ; v1(274.15,502.01) v1(250,502.01) 199.68,451.69 ; v1(274.15,883.15) v1(250,883.15) 246.85,883.15 225,905 200,905 ; v1(274.15,1067.01) v1(250,1067.01) 200,1017.01 200,905 ; 145,451.69 145,680 ; 145,451.69 199.68,451.69 ; 145,680 145,770 ; 145,680 160,695 160,755 145,770 ; 145,770 145,850 200,905
  Bottom Layer w25: v1(430,1120) v1(430,1140)
  other v1: 155,700 155,720 155,740
VCORE: C8.02 C10.02 C11.02 C12.02 J4.02 U9.46 U9.51 U9.81 U9.116 U9.117 | length 2164.4
  Top Layer w8: v1(705,690) 705,640 689.88,624.88 ; v1(955,950) 952.13,952.87 U9.81 952.13,1047.13 C10.02@990,1085 ; U9.46 1302.4,640.63 1325,618.03 1325,601.16 1334.22,591.94 1334.22,586.56 C12.02 ; U9.51 1309.37,719.37 1325,735 C11.02@1346.22,735 ; C11.02@1350,735.78 C11.02@1351,734.78 ; C12.02@1354.78,555 v1(1355,555) ; 689.88,624.88 U9.116 590.88,624.88 606.63,609.13 U9.117 674.13,609.13 689.88,624.88
  Top Layer w12: v1(1335,770) 1335,750.78 C11.02@1350,735.78
  L3 w35: v1(705,690) 780,690 915,825 ; v1(1335,770) 1325,780 1225,780 1172.5,727.5 ; v1(1355,555) 1355,565 1241,679 1221,679 1172.5,727.5 ; 915,825 962.5,825 985,847.5 ; 915,825 v1(937.5,847.5) v1(965.77,847.5) 985,847.5 ; 985,847.5 1052.5,847.5 1172.5,727.5
  Bottom Layer w15: 925,835 925,840 ; v1(955,950) 965.77,939.23 v1(965.77,847.5)
  Bottom Layer w25: J4.02 871,786 907.5,822.5 ; v1@932.5,847.5 925,840 907.5,822.5 ; v1(937.5,847.5) v1(965.77,847.5) 965.77,845.77 v1(942.5,822.5) 907.5,822.5
VCORE_EN: C47.02 R16.01 U11.01 | length 126.3
  Bottom Layer w10: C47.02 410.29,709 R16.01@456.29,755 ; R16.01 U11.01@525,755
VDD18: C21.02 C22.02 C23.02 C24.02 U9.20 U9.26 U9.28 U9.50 U9.65 U9.89 U9.97 U9.107 | length 2991.5
  Top Layer w8: C21.02 605,964.13 U9.97 704.09,924.09 v1(720,940) ; U9.107 v1(745,766.61) ; v1(825,940) 826.14,941.14 U9.89 ; C23.02 v1(979.12,284) 1015.12,320 U9.20 ; U9.26 1109.61,295.39 v1(1120,285) ; v1(1175,800) 1175,755 1226.38,703.62 U9.50 ; C22.02 1204.09,1090.09 U9.65 1219.05,980 v1(1235,980)
  Top Layer w9: C24.02@1141.1,290 U9.28
  L3 w8: 640,765 641.61,766.61 v1(745,766.61)
  L3 w20: v1(1120,285) 995,285 ; v1(1175,800) 1175,920 ; v1(1235,980) 1175,920 ; 690,925 720,925 735,940 ; 690,925 640,875 640,765 640,743.08 600,703.08 600,395 710,285 960,285 ; 690,925 705,940 v1(720,940) 735,940 ; 735,940 805,940 ; 805,940 825,920 845,920 ; 805,940 v1(825,940) 845,920 ; 845,920 1175,920 ; 960,285 975,270 980,270 995,285 ; 960,285 995,285
VDDIO: C3.02 C17.02 C18.02 C19.02 C20.02 C25.02 C48.01 J3.02 P1.04 P2.02 R4.01 R5.02 R6.02 R7.02 R8.02 R9.02 R19.02 R20.02 R21.02 R22.02 R23.02 R29.01 R30.01 R34.02 U6.03 U6.07 U6.08 U8.03 U9.29 U9.34 U9.66 U9.77 U9.83 U9.128 U10.01 U10.14 | length 7038.2
  Top Layer w8: C48.01 U10.14@440.43,45 ; U10.14 445.32,24.68 455,15 500,15 520.12,35.12 U10.01 545.63,65.63 716,236 R5.02 R6.02 R7.02 R8.02 R9.02 901,236 925,260 v1(925,315) ; C17.02@572.06,435.91 U9.128 640,430.87 v1(640,415) ; v1(895,1096) 895,1075 920.63,1049.37 U9.83 ; v1(1100,1096) C18.02 1068,1060 1055,1060 1015.12,1020.12 U9.77 1015.12,959.88 1030,945 1180,945 1188.35,953.35 U9.66 1188.35,1077.65 C19.02 ; U9.29 1156.85,323.15 1165,315 1211,315 v1(1221,305) ; U9.34 1330.65,451.65 ; R19.02 1567.39,561.17 1565,563.56 v1(1565,565)
  Top Layer w12: C20.02@1359,451 1330,451 R29.01 R30.01
  Top Layer w20: v1(1221,305) C25.02
  L3 w10: v1(520,1035) 535,1035 575,1075
  L3 w30: v1(1221,305) v1@1221,306.93
  L3 w35: v1(640,415) 700,355 925,355 ; 650,1110 615,1075 575,1075 620,1120 741,1120 ; v1@925,316.5 925,355 ; v1@1221.97,305.97 1221,306.93 1172.93,355 ; 1244,1120 741,1120 ; P2.02 1415,1180 1305,1180 1249,1124 1249,1096 ; 741,1120 v1(765,1096) v1(825,1096) v1(895,1096) v1(950,1096) v1(1100,1096) v1(1166,1096) 1249,1096 ; 925,355 1172.93,355 ; 1172.93,355 1195,355 1290,450 1320,450 ; 1249,1096 1527.5,817.5 1527.5,767.28 ; 1320,450 v1(1360,450) 1400,450 ; 1320,450 1340,430 1380,430 1400,450 ; 1400,450 1482.39,450 1550,517.61 1550,699.78 ; 1527.5,767.28 1527.5,722.28 1550,699.78 ; 1527.5,767.28 v1(1550,744.78) v1(1550,719.78) 1550,699.78
  Bottom Layer w8: v1(925,315) 925,335 965,375 U6.03 ; U6.08@1251,275 v1(1221,305) 1241,325 U6.07 ; R34.02 1356,450 v1(1360,450)
  Bottom Layer w14: 403.35,475 580,475
  Bottom Layer w15: U8.03 403.35,475 ; 580,475 v1(640,415) ; v1(765,1096) v1(825,1096) v1(895,1096) v1(950,1096) v1(1100,1096) v1(1166,1096)
  Bottom Layer w20: C3.02@1424,690 1442.31,708.31 P1.04 1538.31,708.31 1550,720 v1(1550,744.78) v1(1550,719.78)
  Bottom Layer w25: J3.02 v1(614,1074) 645,1105 625,1105 ; 575,1075 605,1105 625,1105 ; 600,1080 625,1105
  other v1: 585,1074 635,1095
VDRAM: C9.02 C26.02 C40.02 TP3.01 U9.30 U9.48 U9.49 | length 856.4
  Top Layer w8: 1172.6,402.6 U9.30 1172.6,337.4 1183,327 TP3.01@1262,327 ; C9.02@1349.22,640 1337.13,640 1305,672.13 U9.48 1274.96,680 U9.49 1315,687.87 C9.02@1355,647.87
  Top Layer w12: C26.02 1419.1,645.78 C40.02
  Top Layer w15: 1172.6,402.6 1172.6,612.6 1240,680
  Top Layer w20: C9.02 C26.02
  Top Layer w25: 1240,680 1274.96,680
XI: C43.01 U9.23 X2.01 | length 327.5
  Top Layer w8: U9.23 1062.36,247.36 1050,235 1050,146 X2.01 ; X2.01@1099,97 C43.01@1150,97
XI_RTC: C39.01 R26.01 U9.25 X1.01 | length 376.1
  Top Layer w8: U9.25 1093.86,268.11 1104.97,257 1124.97,257 1151.97,230 R26.01 ; R26.01@1193,228 1247.06,228 X1.01 1255,210 C39.01@1320,145
XO: C42.01 U9.22 X2.02 | length 256.7
  Top Layer w8: C42.01@958,145 X2.02 1011,216 1046.61,251.61 U9.22
XO_RTC: C38.01 R26.02 U9.24 X1.02 | length 432.2
  Top Layer w8: U9.24 1078.11,266.89 1100,245 1120,245 1135,230 1135,200 1153,182 R26.02 1194,182 1230,146 1230,126.94 X1.02 ; C38.01 X1.02@1250.06,97
pads on no net: J1.A8 J1.B8 J2.A8 J2.B8 P3.02 U1.06 U8.02 U9.93 U9.94 U9.106 U9.108 U9.109 U9.110 U9.111 U10.02 U10.03 U10.08 U10.09 U10.13 U10.15 U10.16 X2.03 X2.04

## Polygon pours and split planes (outlines as drawn)
GND on L2 "L2" (solid, remove dead copper, pour order 2): -125,1470 -80,1425 2050,1425 2050,-25 2020,-55 2015,-60 -65,-60
GND on L3 "L3" (solid, remove dead copper, pour order 4): -125,1470 -80,1425 2050,1425 2050,-25 2020,-55 2015,-60 -65,-60
GND on Top Layer "TOP" (solid, remove dead copper, pour order 8): -50,1435 -60,1425 -60,-35 1985,-35 2000,-50 2065,15 2065,1390 1950,1390 1885,1455
GND on Bottom Layer "BOT" (solid, remove dead copper, pour order 10): -45,1420 -50,1415 -50,-50 2015,-50 2045,-20 2025,0 2025,1430

## Keep-outs
Keep-Out Layer:
  the board outline again, w7.87

## Other copper
Top Layer:
  rectangle net GND: 100,295 140,355
  region net GND: 1800,530 1800,570 1740,570 1740,530
  region net GND: 1470,155 1470,195 1410,195 1410,155
  rectangle net GND: 930,650 970,710
  rectangle net GND: 955,650 995,710
  rectangle net GND: 130,1010 170,1070
  region net GND: 910,165 910,205 850,205 850,165
  rectangle net GND: 1450,315 1490,375
  rectangle net GND: 635,1020 675,1060
  rectangle net GND: 675,1170 715,1230
  rectangle net GND: 970,1170 1010,1230
  rectangle net GND: 1175,1170 1215,1230
  rectangle net GND: 1095,1170 1135,1230
  region net GND: 1726.77,1240 1686.77,1240 1686.77,1180 1726.77,1180
  rectangle net GND: 445,85.5 485,125.5
  region net VDRAM: 1274.96,687.87 1274.96,672.13 1305,672.13 1337.13,640 1349.22,640 1355,645.78 1355,647.87 1315,687.87
L2:
  rectangle net GND: 100,295 140,355
  region net GND: 1800,530 1800,570 1740,570 1740,530
  region net GND: 1470,155 1470,195 1410,195 1410,155
  rectangle net GND: 930,650 970,710
  rectangle net GND: 955,650 995,710
  rectangle net GND: 130,1010 170,1070
  region net GND: 910,165 910,205 850,205 850,165
  rectangle net GND: 1450,315 1490,375
  rectangle net GND: 635,1020 675,1060
  rectangle net GND: 675,1170 715,1230
  rectangle net GND: 970,1170 1010,1230
  rectangle net GND: 1175,1170 1215,1230
  rectangle net GND: 1095,1170 1135,1230
  region net GND: 1726.77,1240 1686.77,1240 1686.77,1180 1726.77,1180
  rectangle net GND: 445,85.5 485,125.5
L3:
  rectangle net GND: 100,295 140,355
  region net GND: 1800,530 1800,570 1740,570 1740,530
  region net GND: 1470,155 1470,195 1410,195 1410,155
  rectangle net GND: 930,650 970,710
  rectangle net GND: 955,650 995,710
  rectangle net GND: 130,1010 170,1070
  region net GND: 910,165 910,205 850,205 850,165
  rectangle net GND: 1450,315 1490,375
  rectangle net GND: 635,1020 675,1060
  rectangle net GND: 675,1170 715,1230
  rectangle net GND: 970,1170 1010,1230
  rectangle net GND: 1175,1170 1215,1230
  rectangle net GND: 1095,1170 1135,1230
  region net GND: 1726.77,1240 1686.77,1240 1686.77,1180 1726.77,1180
  rectangle net GND: 445,85.5 485,125.5
Bottom Layer:
  rectangle net GND: 100,295 140,355
  region net GND: 1800,530 1800,570 1740,570 1740,530
  region net GND: 1470,155 1470,195 1410,195 1410,155
  rectangle net GND: 930,650 970,710
  rectangle net GND: 955,650 995,710
  rectangle net GND: 130,1010 170,1070
  region net GND: 910,165 910,205 850,205 850,165
  rectangle net GND: 1450,315 1490,375
  rectangle net GND: 635,1020 675,1060
  rectangle net GND: 675,1170 715,1230
  rectangle net GND: 970,1170 1010,1230
  rectangle net GND: 1175,1170 1215,1230
  rectangle net GND: 1095,1170 1135,1230
  region net GND: 1726.77,1240 1686.77,1240 1686.77,1180 1726.77,1180
  rectangle net GND: 445,85.5 485,125.5

## Silkscreen, mask and mechanical layers (free items; w line width, h text height)
Top Overlay:
  circle w10: c683.82,83.94 r35.65
  lines w7.87: 660.2,60.32 707.44,107.56 ; 660.2,107.56 707.44,60.32 ; 672.01,194.17 695.63,194.17 ; 672.01,198.11 695.63,198.11 ; 672.01,202.05 695.63,202.05 ; 683.82,135.12 683.82,213.86 ; 735,80 813.74,80 ; 794.06,68.19 794.06,91.81 ; 797.99,68.19 797.99,91.81 ; 801.93,68.19 801.93,91.81 ; 683.82,213.86 660.2,190.24 707.44,190.24 683.82,213.86 ; 813.74,80 790.12,103.62 790.12,56.38 813.74,80
  text "G" at 1670,1200 h35.43 r90
  text "5V" at 670,1180 h35.43 r90
  text "B2" at 770,1180 h35.43 r90
  text "B3" at 870,1180 h35.43 r90
  text "B4" at 970,1180 h35.43 r90
  text "B5" at 1070,1180 h35.43 r90
  text "B6" at 1170,1180 h35.43 r90
  text "B7" at 1270,1180 h35.43 r90
  text "3V" at 1570,1180 h35.43 r90
  text "D21" at 1370,1160 h35.43 r90
  text "ADC" at 1470,1155 h35.43 r90
  text "UART" at 335,685 h35.43 r90
  text "VIN" at 120,625 h35.43
  text "TinyEmbedded" at 1470,405 h35.43
  text "Dual" at 1615,345 h35.43
  text "RST" at 1380,265 h35.43
  text "E0" at 1545,265 h35.43
  text "Y" at 644.45,135.12 h35.43
  text "USB0" at 335,120 h35.43 r90
  text "X" at 746.81,95.75 h35.43
  text "Z" at 600.2,40.32 h35.43
Bottom Overlay:
  text "G / TX / RX / 5V" at 499.47,1270.45 h35.43 r90
  text "D21" at 1374.23,1250.77 h35.43 r90
  text "ADC" at 1465,1250 h35.43 r90
  text "5V" at 670,1240 h35.43 r90
  text "B2" at 770,1240 h35.43 r90
  text "B3" at 870,1240 h35.43 r90
  text "B4" at 970,1240 h35.43 r90
  text "B5" at 1070,1240 h35.43 r90
  text "B6" at 1170,1240 h35.43 r90
  text "B7" at 1270,1240 h35.43 r90
  text "3V" at 1570,1240 h35.43 r90
  text "G" at 1670,1220 h35.43 r90
  text "Ver:A" at 195,900 h35.43
  text "Wi-Fi" at 615,280 h35.43
  text "TinyEmbedded Dual Linux EVB / Yu-An Chen 2024/01/19" at 1750,25 h35.43